# EAGLE board Home Automation Original  (EAGLE 7.6.0)

Size 73.58 x 63.39 mm. Coordinates in mm from the lower left corner, seen from the top.
Outline: 0,0 56.82,0 56.82,53.33 0,53.33 0,0
Copper layers (1*16): Top 0.035mm / dielectric 1.5mm / Bottom 0.035mm
Design rules "default": minimum track width 10mil, minimum drill 24mil, track to track 8mil, track to pad 8mil, pad to pad 8mil, via to via 8mil, smd to smd 8mil, copper to edge 40mil, drill to drill 8mil, minimum pad ring 10mil, minimum via ring 8mil, stop-mask expansion 4mil, vias tented up to drill 0mil, thermal gap 10mil

## Footprints (pad centres in the part's own frame; a part is rotated, then mirrored left to right if it is on the bottom)
SNR6-D19.0MM = drill 1.3 pad 2: 1 -3.355,3.355; 2 -3.355,-3.355; 3 3.355,3.355; 4 3.355,-3.355; 5 0,4.75; 6 0,-4.75
M3XXH = drill 1.016 long: 1 -3.81,3.81; 2 -3.81,-3.81; O -6.35,-3.81; P 6.35,-3.81; P@ 6.35,3.81; S -6.35,3.81
2P-2.54-65/35MIL = drill 0.889 pad 1.651 square: 1 0,1.27 | drill 0.889 pad 1.651: 2 0,-1.27
PIEZO-22MM = drill 1 pad 2.54: P$1 -5,0; P$2 5,0
1X3P-2.54-2.54-11.6-3.0-BLACK-MALE = drill 0.889 pad 1.651 square: 1 0,2.54 | drill 0.889 pad 1.651: 2 0,0; 3 0,-2.54
PHOTORESISTOR-2.54 = drill 1 pad 1.5: P$1 -1.27,0; P$2 1.27,0
0207/10 = drill 0.813 octagon: 1 -5.08,0; 2 5.08,0
M251 = drill 0.813 long: 1 -2.54,0; 2 0,0; 3 2.54,0
ARDUINO_UNO = drill 1.016 pad 1.88: 0 63.5,50.8; 1 60.96,50.8; 2 58.42,50.8; 3 55.88,50.8; 3.3V 35.56,2.54; 4 53.34,50.8; 5 50.8,50.8; 5V 38.1,2.54; 6 48.26,50.8; 7 45.72,50.8; 8 41.656,50.8; 9 39.116,50.8; 10 36.576,50.8; 11 34.036,50.8; 12 31.496,50.8; 13 28.956,50.8; A0 50.8,2.54; A1 53.34,2.54; A2 55.88,2.54; A3 58.42,2.54; A4 60.96,2.54; A5 63.5,2.54; AREF 23.876,50.8; GND 26.416,50.8; GND. 43.18,2.54; GND.. 40.64,2.54; I/OREF 30.48,2.54; N/C 27.94,2.54; RESET 33.02,2.54; SCL 18.796,50.8; SDA 21.336,50.8; VIN 45.72,2.54 | hole 3.2: 66.04,7.62; 66.04,35.56; 15.24,50.8; 13.97,2.54
TO92 = drill 0.813 octagon: 1 1.27,0; 2 0,1.905; 3 -1.27,0
1X16P-2.54-2.54-11.6-3.0-BLACK-MALE = drill 0.889 pad 1.651 square: 1 0,19.05 | drill 0.889 pad 1.651: 2 0,16.51; 3 0,13.97; 4 0,11.43; 5 0,8.89; 6 0,6.35; 7 0,3.81; 8 0,1.27; 9 0,-1.27; 10 0,-3.81; 11 0,-6.35; 12 0,-8.89; 13 0,-11.43; 14 0,-13.97; 15 0,-16.51; 16 0,-19.05

## Placement (x,y rotation side)
GAS1  [SNR6-D19.0MM]  5,175.18 0 top  (outside the outline)
K1  [M3XXH]  5,73.58 0 top  (outside the outline)
K2  [M3XXH]  5,162.48 0 top  (outside the outline)
L1  [2P-2.54-65/35MIL]  5,137.08 0 top  (outside the outline)
L2  [2P-2.54-65/35MIL]  5,149.78 0 top  (outside the outline)
M2  [2P-2.54-65/35MIL]  5,60.88 0 top
P2  7.1V  [2P-2.54-65/35MIL]  5,86.28 0 top  (outside the outline)
PIEZO1  [PIEZO-22MM]  5,187.88 0 top  (outside the outline)
PING1  [1X3P-2.54-2.54-11.6-3.0-BLACK-MALE]  5,22.78 0 top
PIR1  [1X3P-2.54-2.54-11.6-3.0-BLACK-MALE]  5,48.18 0 top
R1  [PHOTORESISTOR-2.54]  5,111.68 0 top  (outside the outline)
R2  1k‎Ω  [0207/10]  5,124.38 0 top  (outside the outline)
R3  5k‎Ω  [0207/10]  5,200.58 0 top  (outside the outline)
R5  1k‎Ω  [0207/10]  5,238.68 0 top  (outside the outline)
R6  220‎Ω  [0207/10]  5,251.38 0 top  (outside the outline)
S1  [M251]  5,98.98 0 top  (outside the outline)
SERVO1  [1X3P-2.54-2.54-11.6-3.0-BLACK-MALE]  5,35.48 0 top
U1  [ARDUINO_UNO]  5,10.08 0 top
U2  [TO92]  5,213.28 0 top  (outside the outline)
U4  [1X16P-2.54-2.54-11.6-3.0-BLACK-MALE]  5,225.98 0 top  (outside the outline)

## Library data of the parts
GAS1 K1 K2 L1 L2 M2 P2 PIEZO1 PING1 PIR1 R1-R3 R5 R6 S1 SERVO1 U1 U2 U4 = AUTODESK_CIRCUITS_BREADBOARD

## Nets
N$1: GAS1.2 GAS1.4 GAS1.6 PING1.2 PIR1.2 R2.1 R6.2 SERVO1.2 U1.5V U2.3 U4.2
N$2: PING1.3 U1.6
N$3: SERVO1.3 U1.7
N$4: PIR1.3 U1.9
N$5: K1.S M2.1
N$6: K1.P L1.1 P2.1
N$7: K2.O P2.2 S1.2
N$8: M2.2 S1.1
N$9: K1.2 U1.10
N$10: R1.P$1 R2.2 U1.A0
N$11: L1.2 L2.2
N$12: K2.P L2.1
N$13: GAS1.1 R3.1
N$14: GAS1.3 U1.A1
N$15: PIEZO1.P$1 U1.8
N$16: K2.1 U1.13
N$17: U1.A4 U2.2
N$18: GAS1.5 K1.1 K2.2 PIEZO1.P$2 PING1.1 PIR1.1 R1.P$2 R3.2 R5.2 SERVO1.1 U1.GND.. U2.1 U4.1 U4.5 U4.16
N$19: R5.1 U4.3
N$20: R6.1 U4.15
N$21: U1.12 U4.4
N$22: U1.11 U4.6
N$23: U1.5 U4.11
N$24: U1.4 U4.12
N$25: U1.3 U4.13
N$26: U1.2 U4.14

## Tracks (layer width: path | path; a pad name or v marks a point on that pad's centre or on a via)
N$1  (10 unrouted)
N$2  (1 unrouted)
N$3  (1 unrouted)
N$4  (1 unrouted)
N$5  (1 unrouted)
N$6  (2 unrouted)
N$7  (2 unrouted)
N$8  (1 unrouted)
N$9  (1 unrouted)
N$10  (2 unrouted)
N$11  (1 unrouted)
N$12  (1 unrouted)
N$13  (1 unrouted)
N$14  (1 unrouted)
N$15  (1 unrouted)
N$16  (1 unrouted)
N$17  (1 unrouted)
N$18  (14 unrouted)
N$19  (1 unrouted)
N$20  (1 unrouted)
N$21  (1 unrouted)
N$22  (1 unrouted)
N$23  (1 unrouted)
N$24  (1 unrouted)
N$25  (1 unrouted)
N$26  (1 unrouted)